# Altium PCB Copy of PCB1.PcbDoc
Units mm, origin at the board's own origin, x right, y up, seen from the top; angles counter-clockwise.
Board outline 64.77 x 39.12 mm, 2 copper layers (Top Layer, Bottom Layer); 27 components, 46 nets, 154 pads, 61 vias.
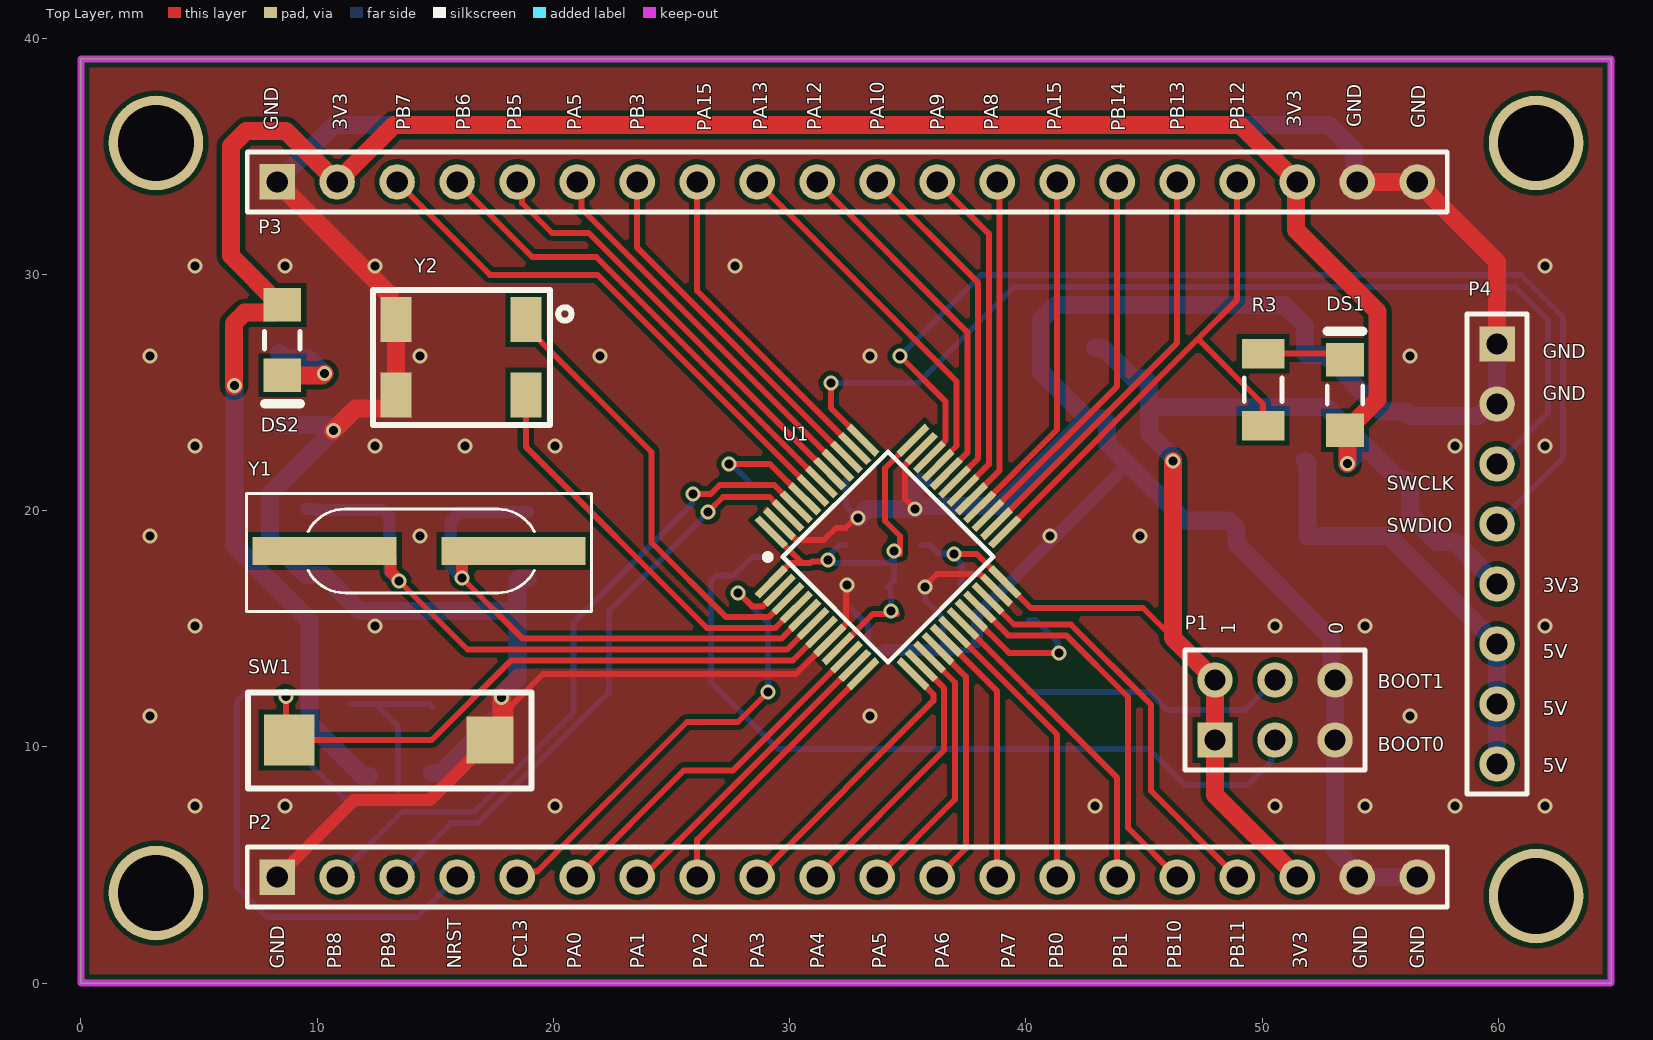
[diagram p0: Top Layer view]
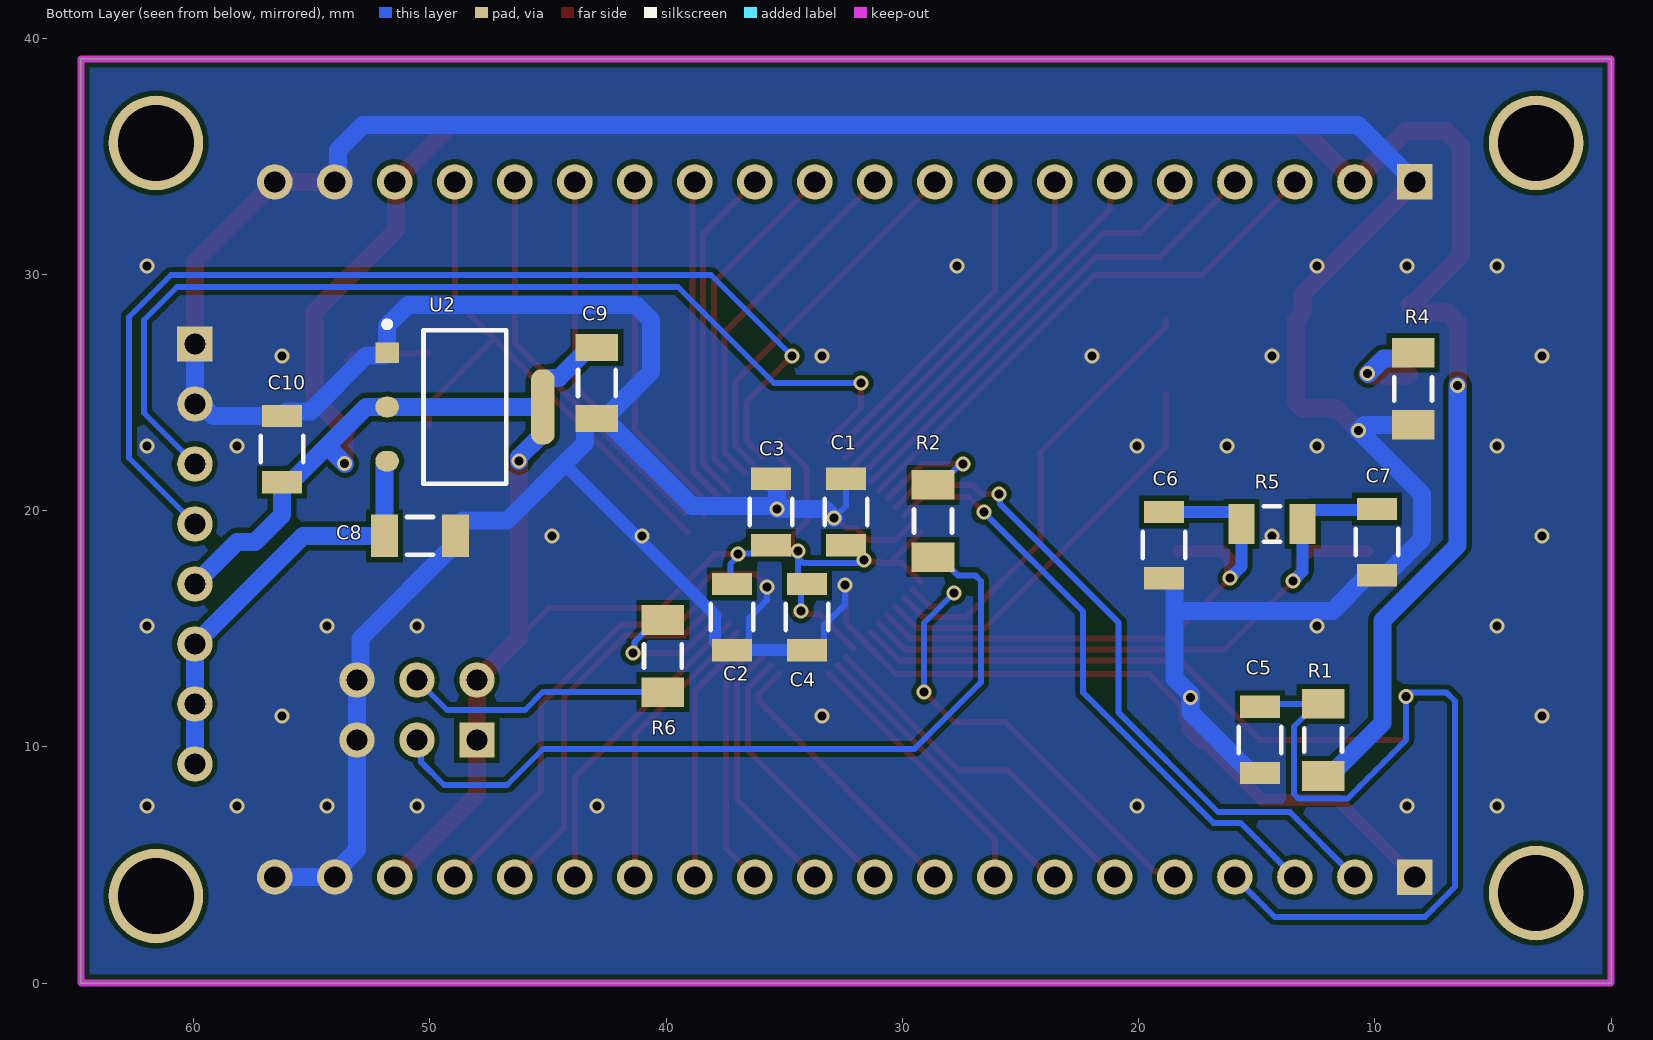
[diagram p1: Bottom Layer view, seen from below]

## Layer stack, top to bottom
Top Solder: solder mask 0.0102, Solder Resist, Dk 3.5
Top Layer: signal copper 0.0356
Dielectric 1: dielectric 0.32, FR-4, Dk 4.8
Bottom Layer: signal copper 0.0356
Bottom Solder: solder mask 0.0102, Solder Resist, Dk 3.5

## Board outline
0,0 64.77,0 64.77,39.116 0,39.116

## Design rules (kind name [scope] priority, off if disabled: settings)
Clearance [All] p1: gap=0.203 ignorepadtopadclearanceinfootprint=TRUE except(0.305: Arc-THPad Arc-Via Arc-Hole Track-THPad Track-Via Track-Hole SMDPad-THPad SMDPad-Via SMDPad-Hole THPad-THPad THPad-Via THPad-Hole Via-Via Via-Hole Fill-Hole Poly-Hole Region-Hole)
DiffPairsRouting DiffPair_DiffPairsRouting [InDifferentialPairClass('diff_90')] p1: maxlimit=0.254 minlimit=0.254 mostfreqgap=0.254 toplayer_minwidth=0.229 toplayer_maxwidth=0.229 toplayer_prefwidth=0.229 bottomlayer_minwidth=0.229 bottomlayer_maxwidth=0.229 bottomlayer_prefwidth=0.229 maxuncoupledlength=12.7
DiffPairsRouting DiffPair_90DiffPairsRouting [InDifferentialPairClass('diff_90')] p2: maxlimit=0.305 minlimit=0.305 mostfreqgap=0.305 toplayer_minwidth=0.254 toplayer_maxwidth=0.254 toplayer_prefwidth=0.254 bottomlayer_minwidth=0.254 bottomlayer_maxwidth=0.254 bottomlayer_prefwidth=0.254 maxuncoupledlength=12.7
DiffPairsRouting [All] p3: maxlimit=0.254 minlimit=0.254 mostfreqgap=0.254 toplayer_minwidth=0.381 toplayer_maxwidth=0.381 toplayer_prefwidth=0.381 bottomlayer_minwidth=0.381 bottomlayer_maxwidth=0.381 bottomlayer_prefwidth=0.381 maxuncoupledlength=12.7
MatchedLengths DiffPair_MatchedLengths [InDifferentialPairClass('diff_90')] p1: tolerance=25.4 checknetsindiffpair=FALSE checkdiffpairvsdiffpair=TRUE checkxsignals=TRUE checkothers=TRUE
MatchedLengths DiffPair_90MatchedLengths [InDifferentialPairClass('diff_90')] p2: tolerance=25.4 checknetsindiffpair=FALSE checkdiffpairvsdiffpair=TRUE checkxsignals=TRUE checkothers=TRUE
PolygonConnect [All] p1: connectstyle=Direct reliefconductorwidth=0.254 reliefentries=4 polygonreliefangle="90 Angle" airgapwidth=0.254
RoutingVias [All] p1: holewidth=0.711 width=1.27 viastyle="Through Hole" minholewidth=0.711 minwidth=1.27 maxholewidth=0.711 maxwidth=1.27
SolderMaskExpansion [All] p1: expansion=0.102 istentingtop=FALSE
Width [All] p1: maxlimit=0.762 minlimit=0.254 preferedwidth=0.305
29 further rules are at their usual default settings.

## Classes and differential pairs
component class Sheet2: 23mil C8 C9 C10 P2 P3 P4 U2
component class Sheet1: 23mil C1 C2 C3 C4 C5 C6 C7 DS1 DS2 P1 R1 R2 R3 R4 R5 R6 SW1 U1 Y1 Y2

## Components (designator, comment, footprint, x,y, rotation, side; value= is the part's Value field where it differs from the comment)
C1 "C1206 0.1uF" FP-C1206C-EB-MFG 32.385,19.939 r90 bottom value="0.22 μF"
C2 "C1206 0.1uF" FP-C1206C-EB-MFG 37.211,15.491 r270 bottom value="0.22 μF"
C3 "C1206 0.1uF" FP-C1206C-EB-MFG 35.56,19.939 r90 bottom value="0.22 μF"
C4 "C1206 0.1uF" FP-C1206C-EB-MFG 34.036,15.491 r270 bottom value="0.22 μF"
C5 "C1206 0.1uF" FP-C1206C-EB-MFG 14.859,10.29 r270 bottom value="0.22 μF"
C6 "C1206 22pf" FP-C1206C-EB-MFG 18.923,18.539 r270 bottom value="20 pF"
C7 "C1206 22pf" FP-C1206C-EB-MFG 9.906,18.666 r270 bottom value="20 pF"
C8 "CAP 10uF 1206" CAPC1206(3216)190_N 50.419,18.923 r0 bottom value=10uF
C9 "CAP 10uF 1206" CAPC1206(3216)190_N 42.926,25.4 r90 bottom value=10uF
C10 "C1206 0.1uF" FP-C1206C-EB-MFG 56.261,22.603 r90 bottom value="0.22 μF"
DS1 "597-3311-407F" DIAL-597-3311-407F_V 53.506,24.892 r90 top
DS2 "597-3311-407F" DIAL-597-3311-407F_V 8.524,27.212 r270 top
P1 "Header 3X2" HDR2X3 48.006,10.287 r0 top
P2 "Header 20" HDR1X20 8.306,4.484 r0 top
P3 "Header 20" HDR1X20 8.306,33.909 r0 top
P4 "Header 8" HDR1X8 59.944,27.051 r270 top
R1 "RC1206 10K" RESC3116X65X40ML10T20 12.192,10.288 r90 bottom
R2 "RC1206 10K" RESC3116X65X40ML10T20 28.702,19.557 r270 bottom
R3 "RC1206 1K" RESC3116X65X40ML10T20 50.038,25.117 r90 top
R4 "RC1206 1K" RESC3116X65X40ML10T20 8.382,25.147 r90 bottom
R5 "1M 1206" RESC3216X70X50LL20T25 14.351,19.431 r180 bottom
R6 "RC1206 10K" RESC3116X65X40ML10T20 40.132,13.842 r270 bottom
SW1 "TACT SWITCH" SW_342_SMD 17.313,10.287 r0 top
U1 "STM32F103C8T6" LQFP-48_19.6_393_58X11_SMD 34.163,18.034 r45 top locked
U2 "AMS1117-3.3" FP-AMS1117-IPC_C 48.514,24.384 r180 bottom
Y1 "8MHz" XTAL_314_240X47_SMD 18.319,18.288 r180 top
Y2 "32.768KHz" "XTAL_MC-405 32.7680K-G3" 18.835,24.892 r180 top

## Footprints (in the part's own frame and the unit in brackets; to place one, negate y for a bottom-side part, rotate by r counter-clockwise, add the part's x,y. Pads: shape width x height; smd on the part's side, far side on the other; paste and mask are expansions set on the pad)
CAPC1206(3216)190_N [mm] "Chip Capacitor, Body 3.2x1.6mm, Height 1.9mm, IPC Medium Density"
  rect 1.15x1.8 smd: 1(-1.5,0) 2(1.5,0)
  silkscreen extent -0.55,-0.8 0.55,0.8, body extent -1.7,-0.9 1.7,0.9, height 1.9
DIAL-597-3311-407F_V [mm] "SMD, 2-Leads, Body 1.5x3mm"
  rect 1.42x1.6 smd: 1(-1.49,0) 2(1.49,0)
  silkscreen extent -0.38,-0.75 2.7,0.75, body extent -1.5,-0.75 1.5,0.75, height 1.5
FP-AMS1117-IPC_C [mm]
  rect 1.004x0.872 smd paste+0 mask+0: 1(-3.295,2.29)
  rrect100% 1.004x0.872 smd paste+0 mask+0: 2(-3.295,0) 3(-3.295,-2.29)
  rrect87% 1.004x3.182 smd paste+0 mask+0: 4(3.295,0)
  silkscreen extent -3.42,-3.25 1.75,3.62, body extent -3.53,-3.25 3.53,3.25, height 1.8
FP-C1206C-EB-MFG [mm]
  rect 0.95x1.7 smd paste+0 mask+0: 1(-1.4,0) 2(1.4,0)
  silkscreen extent -0.55,-0.9 0.55,0.9, body extent -1.6,-0.8 1.6,0.8, height 0.88
HDR1X8 [mm] "Connector; Header; 8 Position"
  rect 1.5x1.5 hole 0.9: 1(0,0)
  round 1.5 hole 0.9: 2(2.54,0) 3(5.08,0) 4(7.62,0) 5(10.16,0) 6(12.7,0) 7(15.24,0) 8(17.78,0)
  silkscreen extent -1.27,-1.27 19.05,1.27
HDR1X20 [mm] "Connector; Header; 20 Position"
  rect 1.5x1.5 hole 0.9: 1(0,0)
  round 1.5 hole 0.9: 2(2.54,0) 3(5.08,0) 4(7.62,0) 5(10.16,0) 6(12.7,0) 7(15.24,0) 8(17.78,0) 9(20.32,0) 10(22.86,0) 11(25.4,0) 12(27.94,0) 13(30.48,0) 14(33.02,0) 15(35.56,0) 16(38.1,0) 17(40.64,0) 18(43.18,0) 19(45.72,0) 20(48.26,0)
  silkscreen extent -1.27,-1.27 49.53,1.27
HDR2X3 [mm] "Connector; Header; 3x2 Position"
  rect 1.5x1.5 hole 0.9: 1(0,0)
  round 1.5 hole 0.9: 2(0,2.54) 3(2.54,0) 4(2.54,2.54) 5(5.08,0) 6(5.08,2.54)
  silkscreen extent -1.27,-1.27 6.35,3.81
LQFP-48_19.6_393_58X11_SMD [mm] "48LQFP"
  rect 1.7x0.3 smd mask+0.076: 1(-4.238,2.75) 2(-4.238,2.25) 3(-4.238,1.75) 4(-4.238,1.25) 5(-4.238,0.75) 6(-4.238,0.25) 7(-4.238,-0.25) 8(-4.238,-0.75) 9(-4.238,-1.25) 10(-4.238,-1.75) 11(-4.238,-2.25) 12(-4.238,-2.75) 25(4.238,-2.75) 26(4.238,-2.25) 27(4.238,-1.75) 28(4.238,-1.25) 29(4.238,-0.75) 30(4.238,-0.25) 31(4.238,0.25) 32(4.238,0.75) 33(4.238,1.25) 34(4.238,1.75) 35(4.238,2.25) 36(4.238,2.75)
  rect 0.3x1.7 smd mask+0.076: 13(-2.75,-4.238) 14(-2.25,-4.238) 15(-1.75,-4.238) 16(-1.25,-4.238) 17(-0.75,-4.238) 18(-0.25,-4.238) 19(0.25,-4.238) 20(0.75,-4.238) 21(1.25,-4.238) 22(1.75,-4.238) 23(2.25,-4.238) 24(2.75,-4.238) 37(2.75,4.238) 38(2.25,4.238) 39(1.75,4.238) 40(1.25,4.238) 41(0.75,4.238) 42(0.25,4.238) 43(-0.25,4.238) 44(-0.75,4.238) 45(-1.25,4.238) 46(-1.75,4.238) 47(-2.25,4.238) 48(-2.75,4.238)
  silkscreen extent -3.72,-3.15 3.15,3.72, body extent -4.5,-4.5 4.5,4.5, height 1.7
RESC3116X65X40ML10T20 [mm] "Chip Resistor, 2-Leads, Body 3.10x1.60mm, IPC Low Density"
  rect 1.25x1.8 smd: 1(-1.525,0) 2(1.525,0)
  silkscreen extent -0.5,-0.8 0.5,0.8, body extent -1.6,-0.85 1.6,0.85, height 0.65
RESC3216X70X50LL20T25 [mm] "Chip Resistor, 2-Leads, Body 3.20x1.60mm, IPC High Density"
  rect 1.1x1.7 smd: 1(-1.3,0) 2(1.3,0)
  silkscreen extent -0.35,-0.75 0.35,0.75, body extent -1.7,-0.9 1.7,0.9, height 0.7
SW_342_SMD [mm] "CASE: SMD"
  rect 2x2 smd: 1(0,0)
  rect 2.15x2.15 smd: 2(-8.5,0)
  silkscreen extent -10.25,-2.06 1.75,2, body extent -7.17,-1.79 -1.17,1.71, height 2.4
XTAL_314_240X47_SMD [mm] "CASE: TH"
  rect 6.096x1.2 smd: 1(0,0) 2(8,0)
  silkscreen extent -3.29,-2.44 11.32,2.57, body extent -2.99,-2.27 10.9,2.41, height 3.05
"XTAL_MC-405 32.7680K-G3" [mm] "Crystal"
  rect 1.3x1.9 smd: 1(0,-3.2) 2(5.5,-3.2) 3(5.5,0) 4(0,0)
  silkscreen extent -1.93,-4.44 6.48,1.27, body extent -1.02,-4.44 6.48,1.27, height 3.6

## Part data
C1 C2 C3 C4 C5 C10: library part CMP-03020-014280-1, "CAP CER 0.22UF 50V X7R 1206", Capacitance="0.22 μF", Manufacturer=KEMET, Manufacturer Part Number=C1206C224K5RACTU, Package=C1206C-EB, Temperature="-55°C to +150°C", Temperature Characteristic=X7R, Temperature Coefficient=15%, Temperature Range High=+150°C, Temperature Range Low=-55°C, Tolerance=0.1, Voltage Rating="50 V", Automotive=Yes, Automotive Grade="Grade 0", Category=Cap, ComponentLink2Description=Datasheet, ComponentLink2URL=https://content.kemet.com/datasheets/KEM_C1007_X8R_ULTRA_150C_SMD.pdf, Device Class L1="Passive Components", Device Class L2=Capacitors, Device Class L3="Ceramic Capacitors", Digikey Description="CAP CER 0.22UF 50V X7R 1206", Height=0.88mm, Ipc Land Pattern Name=CAPC320160X78, Lead Free=Yes, Material=Ceramic, Octopart=https://octopart.com/c1206c224k5ractu-kemet-99129, RoHS=TRUE
C6 C7: library part CMP-1037-00940-2, "1206 C 20pF Ceramic Multilayer Capacitor; 50 VDC; +125degC; C0G Dielec; +/-5%", Capacitance="20 pF", Manufacturer=KEMET, Manufacturer Part Number=C1206C200J5GACTU, Package=C1206C-EB, Temperature="-55°C to +150°C", Temperature Characteristic=C0G, Temperature Coefficient=15%, Temperature Range High=+150°C, Temperature Range Low=-55°C, Tolerance=0.05, Voltage Rating="50 V", Automotive=Yes, Automotive Grade="Grade 0", Category=Cap, ComponentLink2Description=Datasheet, ComponentLink2URL=https://content.kemet.com/datasheets/KEM_C1007_X8R_ULTRA_150C_SMD.pdf, Device Class L1="Passive Components", Device Class L2=Capacitors, Device Class L3="Ceramic Capacitors", Digikey Description="1206 C 20pF Ceramic Multilayer Capacitor; 50 VDC; +125degC; C0G Dielec; +/-5%", Height=0.88mm, Ipc Land Pattern Name=CAPC320160X78, Lead Free=Yes, Material=Ceramic, Mouser Description="1206 C 20pF Ceramic Multilayer Capacitor; 50 VDC; +125degC; C0G Dielec; +/-5%", Octopart=https://octopart.com/c1206c200j5gactu-kemet-139653, RoHS=TRUE
C8 C9: library part CMP-1037-04961-1, "CAP 10uF 6.3V ±10% 1206 (3216 Metric) Thickness 1.9mm SMD", Case-EIA=1206, Case-Metric=3216, Rated Voltage="6.3 V", Tolerance=Â±10%, Max Thickness="1.9 mm", Technology=SMT
DS1 DS2: library part CMP-2000-05651-1, "LED Green, 75 mW, 30 mA, -30 to 85 degC, 2-Pin SMD, RoHS, Tape and Reel", Emitting Color=YellowGreen, Forward Current=30mA, Forward Voltage=2.5V, Manufacturer=Dialight, Operating Temp Range=-30Cto85C, Operating Temperature Classification=Commercial, Package Description="2-Pin Surface Mount Device, Body 1.5 x 3 mm", Package Type=SMD, Power Dissipation=75W, Reverse Voltage=4V, Test Current (It)=20mA, Chip Material=GaP, Datasheet URL=https://datasheet.ciiva.com/15117/getdatasheetpartid-142484-15117764.pdf, Datasheet Version=07/2002, DELETED=Compliant, High Brightness=No, Lens Dimensions=2x1.5x0.9mm, Lens Type=NonDiffused, Lum Intensity=7.5mcd, Luminous Intensity=7.5mcd, Main Category=ChipLED, Manufacturer URL=http://www.dialight.com/, Mounting=SurfaceMount, Mounting Technology=SurfaceMount, Number of  Elements=1, Package Reference=597-3311-407F, Packaging=TapeandReel, Peak Wavelength=560nm, Pin Count=2, Product Depth (mm)=1.5mm, Product Height (mm)=1.5mm, Product Length (mm)=3mm, Rad Hardened=No, Shape Type=Rectangular, Type=Uni-Color, Viewing Angle=70deg
P1: "Header, 3-Pin, Dual row", LatestRevisionDate=17-Jul-2002, LatestRevisionNote="Re-released for DXP Platform.", Publisher="Altium Limited"
P2 P3: "Header, 20-Pin", LatestRevisionDate=17-Jul-2002, LatestRevisionNote="Re-released for DXP Platform.", Publisher="Altium Limited"
P4: "Header, 8-Pin", LatestRevisionDate=17-Jul-2002, LatestRevisionNote="Re-released for DXP Platform.", Publisher="Altium Limited"
R1 R2 R6: library part CMP-1014-00623-2, "Chip Resistor, 10 KOhm, +/- 1%, 0.25 W, -55 to 155 degC, 1206 (3216 Metric), RoHS, Tape and Reel", Case Code (Imperial)=1206, Case Code (Metric)=3216, Manufacturer=Yageo, Max Operating Temperature=155degC, Min Operating Temperature=-55degC, Package Description="2-Pin Surface Mount Device, Body 3.1 x 1.6 mm", Package Quantity=5000, Package Reference=1206.0, Power Rating=250mW, Resistance=10KOhm, Temperature Coefficient=100ppm/degreesC, Tolerance=1%, Voltage Rating=200V, Case/Package=1206, Composition=ThickFilm, Datasheet URL=http://www.yageo.com/NewPortal/yageodocoutput?fileName=/pdf/R-Chip/PYu-RC_Group_51_RoHS_L_5.pdf, Datasheet Version="Rev. 5, 10/2016", Depth=1.6mm, Height=0.55mm, Lead Free=LeadFree, Length=3.1mm, Manufacturer URL=http://www.yageo.com/, Military Standard=Not, Packaging=TapeandReel, REACH SVHC=Unknown, RoHSCompliant=true, Termination=SMD/SMT, Width=1.6mm
R3 R4: library part CMP-2100-03678-1, "Chip Resistor, 1 KOhm, +/- 1%, 0.25 W, -55 to 155 degC, 1206 (3216 Metric), RoHS, Tape and Reel", Case Code (Imperial)=1206, Case Code (Metric)=3216, Manufacturer=Yageo, Max Operating Temperature=155degC, Min Operating Temperature=-55degC, Package Description="2-Pin Surface Mount Device, Body 3.1 x 1.6 mm", Package Reference=1206.0, Power Rating=250mW, Resistance=1KOhm, Temperature Coefficient=100ppm/degreesC, Tolerance=1%, Voltage Rating=200V, Case/Package=1206, Composition=ThickFilm, Datasheet URL=http://www.yageo.com/NewPortal/yageodocoutput?fileName=/pdf/R-Chip/PYu-RC_Group_51_RoHS_L_5.pdf, Datasheet Version="Rev. 5, 10/2016", Depth=1.6mm, Height=0.55mm, Lead Free=LeadFree, Length=3.1mm, Manufacturer URL=http://www.yageo.com/, Military Standard=Not, Packaging=TapeandReel, REACH SVHC=Unknown, RoHSCompliant=true, Termination=SMD/SMT
R5: library part CMP-2003-04469-1, Manufacturer=Panasonic, Part Number=ERA8AEB470V
SW1: library part SW_KSR223GLFG-SMD, "Tactile Switch SPST-NO Top Actuated Surface Mount", Case/Package=SMD, Manufacturer=C&K, Manufacturing Part Number=KSR223GLFG, Supplier Part Number-1=401-1704-1-ND, Supplier-1=Digikey
U1: library part "IC-STM32F103C8T6 _1", "ARM® Cortex®-M3 STM32F1 Microcontroller IC 32-Bit 72MHz 64KB (64K x 8) FLASH", Case/Package=48-LQFP, Manufacturer=STMicroelectronics, Supplier Part Number-1=497-6063-ND, Manufacturer Part Number=STM32F103C8T6, Supplier-1=Digikey
U2: library part CMP-209535-000001-1, "LDO Voltage Regulators 1A, 3.3V", Dropout Voltage=1.1V, Manufacturer="Advanced Monolithic Systems", Max Junction Temp=+125°C, Max Power Dissipation=1.2W, Max Supply Voltage=15V, Nominal Supply Current=5mA, Output Current=1A, Output Voltage=3.3V, Package=AMS1117, Temperature="-40°C to +125°C", Temperature Range Low=-40°C, Automotive=No, Category=IC, ComponentLink2Description=Datasheet, ComponentLink2URL=http://www.advanced-monolithic.com/pdf/ds1117.pdf, Device Class L1="Integrated Circuits (ICs)", Device Class L2="Power Management ICs", Device Class L3="Voltage Regulators - Linear", Height=1.8mm, Ipc Land Pattern Name=SOT229P700X180-4, Lead Free=Yes, Manufacturer Part Number=AMS1117-3.3, Number Of Outputs=1, Octopart=https://octopart.com/ams1117-3.3-advanced+monolithic+systems-25899300, Output Type=Fixed, RoHS=TRUE, Standoff Height=0.64mm, Temperature Range High=+125°C
Y1: library part XTAL_8MHZ-LFXTAL030234, "Crystals 8MHz 22pF -20C 70C", Case/Package=SMD, Manufacturer="IQD Frequency Products", Manufacturing Part Number=LFXTAL030234Reel, Supplier Part Number-1=449-LFXTAL030234REEL, Supplier-1=Mouser
Y2: library part "XTAL_32.768KHz-MC-405 32.7680K-G3", "Crystals SMD AT XTL MHZ +/-50PPM 12.5 PF 250 T/R", Case/Package=SMD, Manufacturer=Epson, Manufacturing Part Number="MC-405 32.7680K-G3: ROHS", Supplier Part Number-1=732-MC405327680KG3RS, Supplier-1=Mouser

## Free pads (board coordinates)
  round 4 hole 3.2: 2(3.175,3.81) 2(3.175,35.56) 2(61.595,3.683) 2(61.595,35.56)

## Via types
v1: diameter 0.635, hole 0.381, Top Layer to Bottom Layer, tented both sides, 61 vias

## Nets (pads, with @x,y where several pads share a name; then routed paths per layer and width w, separated by ;. In a path a pad name is that pad's centre, name@x,y a point inside that pad or via, vN(x,y) a via of type N, cw(c..) or ccw(c..) an arc to the next point about the centre after c; other vN are vias at no path point)
+3V3: C1.1 C2.1 C3.1 C4.1 C9.2 C10.1 DS1.1 DS2.1 P1.1 P1.2 P2.18 P3.2 P3.18 P4.5 R1.1 U1.1 U1.9 U1.24 U1.36 U1.48 U2.2 U2.4 | length 174.3
  Top Layer w0.254: U1.1 30.02,17.78 30.528,17.78 ; U1.48 30.528,17.78 ; v1(31.623,17.907) 31.55,17.834 30.939,17.834 30.885,17.78 30.528,17.78 ; U1.9 33.518,15.621 v1@34.544,15.621 ; v1@34.671,18.161 34.671,18.923 34.036,19.558 34.036,21.796 U1.36 ; v1(36.957,18.161) 37.925,18.161 U1.24 40.211,15.875 44.958,15.875 46.228,14.605
  Top Layer w0.762: v1@6.477,25.273 6.477,27.927 6.923,28.373 8.195,28.373 DS2.1 8.434,28.702 6.35,30.786 6.35,35.433 6.985,36.068 8.687,36.068 P3.2 13.259,36.322 49.073,36.322 P3.18 51.435,33.858 51.435,31.877 54.89,28.422 54.89,24.696 53.596,23.402 DS1.1 53.618,23.29 v1(53.618,21.995) ; v1(46.228,22.098) 46.228,14.605 P1.2 P1.1 48.006,7.964 P2.18
  Bottom Layer w0.254: v1(31.623,17.907) v1@31.75,17.907 ; C1.1 32.101,18.539 31.753,18.191 31.753,17.78 34.187,17.78 34.417,18.01 34.568,18.161 v1@34.671,18.161 ; v1(34.29,15.748) 34.29,16.637 34.163,16.764 34.417,17.018 v1(34.417,18.288) ; C3.1 35.935,18.539 36.283,18.191 36.927,18.191 v1(36.957,18.161) 36.957,18.064 37.274,17.747 37.274,16.954 C2.1
  Bottom Layer w0.762: v1(6.501,25.297) 6.501,18.52 9.678,15.342 9.678,11.002 11.917,8.763 R1.1 ; C9.2 43.251,26.9 44.543,25.608 44.985,25.608 45.219,25.374 U2.4 ; v1(46.228,22.098) 46.228,22.256 45.219,23.265 U2.4 ; v1@53.594,21.971 54.356,22.733 ; P4.5 58.166,18.669 57.404,18.669 56.261,19.812 C10.1 56.167,21.297 55.792,21.297 54.356,22.733 ; U2.4 U2.2 52.705,24.384 54.356,22.733
+5V: C8.2 P4.6 P4.7 P4.8 U2.3 | length 18.2
  Bottom Layer w0.762: U2.3 51.845,22.094 51.896,22.043 51.896,22.007 51.919,21.984 C8.2 55.372,18.923 P4.6 P4.7 P4.8
BOOT0: P1.3 R2.2 | length 33.7
  Bottom Layer w0.254: R2.2 28.427,18.032 27.654,17.259 26.911,17.259 26.67,17.018 26.67,12.729 29.493,9.906 45.212,9.906 46.736,8.382 49.403,8.382 50.381,9.36 50.381,10.122 P1.3
BOOT1: P1.4 R6.2 | length 11.3
  Bottom Layer w0.254: R6.2 45.214,12.317 45.974,11.557 49.276,11.557 P1.4
GND: C1.2 C2.2 C3.2 C4.2 C5.2 C6.2 C7.2 C8.1 C9.1 C10.2 P1.5 P1.6 P2.1 P2.19 P2.20 P3.1 P3.19 P3.20 P4.1 P4.2 R4.1 SW1.1 U1.8 U1.23 U1.35 U1.47 U2.1 Y2.2 Y2.3 | length 240
  Top Layer w0.254: SW1.1@17.804,10.778 18.186,11.16 18.186,11.709 19.558,13.081 30.271,13.081 U1.8 31.697,14.535 32.385,15.223 32.385,16.51 ; U1.47 29.603,19.44 30.287,18.756 31.456,18.756 31.96,19.26 32.365,19.26 32.79,19.685 v1(32.893,19.685) ; v1(35.306,20.066) 34.885,20.487 34.885,21.91 35.569,22.594 U1.35 ; v1@35.778,16.855 36.235,17.312 38.039,17.312 38.723,16.628 U1.23
  Top Layer w0.508: P2.1 11.569,7.747 14.773,7.747 SW1.1
  Top Layer w0.762: P3.1 13.066,29.149 13.066,28.361 Y2.2 Y2.3 13.335,24.592 13.066,24.323 11.623,24.323 v1@10.668,23.368 ; SW1.1 17.804,10.778 v1(17.804,12.089) ; P3.19 P3.20 59.944,30.531 P4.1
  Bottom Layer w0.254: C1.2 32.385,20.193 v1(32.893,19.685) ; v1(32.421,16.855) 32.421,16.041 33.313,15.149 33.313,14.439 33.661,14.091 C4.2 ; C3.2@35.56,21.212 C3.2@35.935,21.212 ; v1(35.739,16.764) 35.739,16.195 36.488,15.445 36.488,14.439 36.836,14.091 C2.2 37.586,14.091 C2.2@37.934,14.439
  Bottom Layer w0.508: C4.2 C2.2@36.836,14.091 ; C2.2@37.934,14.439 37.934,15.582 44.323,21.971
  Bottom Layer w0.762: P3.1 10.719,36.322 52.832,36.322 53.086,36.068 53.885,35.269 53.885,34.05 P3.19 ; R4.1 10.461,23.622 v1(10.692,23.392) 8.001,20.701 8.001,18.796 9.531,17.266 C7.2 10.281,17.266 11.799,15.748 18.477,15.748 ; C5.2 15.234,8.89 17.804,11.46 v1(17.804,12.089) ; v1@17.78,12.065 17.78,12.192 18.477,12.889 18.477,15.748 ; C6.2 18.571,17.139 18.477,17.045 18.477,15.748 ; v1(32.893,19.685) 33.274,20.066 v1(35.306,20.066) ; C3.2@35.56,21.212 35.306,20.958 v1(35.306,20.066) ; P2.20 P2.19 54.026,4.684 53.086,5.624 P1.5 P1.6 52.945,12.968 52.945,14.572 48.919,18.598 C8.1 48.919,19.248 48.598,19.569 46.725,19.569 44.323,21.971 43.444,22.85 43.444,23.706 43.25,23.9 C9.1 C9.1@42.601,23.9 ; P4.1 P4.2 59.676,24.511 59.168,24.003 C10.2 56.076,24.188 55.06,24.188 52.691,26.557 51.926,26.557 U2.1 51.809,27.82 50.927,28.702 41.275,28.702 40.64,28.067 40.64,25.861 C9.1@42.601,23.9 ; v1(35.306,20.066) 35.433,20.193 38.894,20.193 C9.1@42.601,23.9
  other v1: 4.826,7.493 8.636,7.493 20.066,7.493 42.926,7.493 50.546,7.493 54.356,7.493 58.166,7.493 61.976,7.493 2.921,11.303 33.401,11.303 56.261,11.303 4.826,15.113 12.446,15.113 50.546,15.113 54.356,15.113 61.976,15.113 2.921,18.923 14.351,18.923 41.021,18.923 44.831,18.923 4.826,22.733 12.446,22.733 16.256,22.733 20.066,22.733 58.166,22.733 61.976,22.733 2.921,26.543 14.351,26.543 21.971,26.543 33.401,26.543 56.261,26.543 4.826,30.353 8.636,30.353 12.446,30.353 27.686,30.353 61.976,30.353
NetDS1_2: DS1.2 R3.2 | length 3.6
  Top Layer w0.254: R3.2 53.246,26.642 DS1.2
NetDS2_2: DS2.2 R4.2 | length 4.1
  Top Layer w0.762: DS2.2 10.228,25.722 v1(10.311,25.805)
  Bottom Layer w0.762: R4.2 8.626,26.428 9.64,26.428 9.906,26.162 v1@10.287,25.781
NetR2_1: R2.1 U1.44 | length 5.5
  Top Layer w0.254: v1(27.432,21.971) 29.165,21.971 U1.44
  Bottom Layer w0.254: v1(27.432,21.971) 27.505,21.898 27.611,21.898 28.427,21.082 R2.1
NetR6_1: R6.1 U1.20 | length 6.5
  Top Layer w0.254: U1.20 39.288,13.97 v1(41.402,13.97)
  Bottom Layer w0.254: R6.1 40.407,15.367 41.329,14.445 41.329,14.043 v1(41.402,13.97)
NRST: C5.1 P2.4 R1.2 SW1.2 U1.7 | length 63.7
  Top Layer w0.254: v1(8.675,12.131) 8.675,10.425 SW1.2 14.846,10.287 18.218,13.659 30.141,13.659 U1.7
  Bottom Layer w0.254: v1(8.675,12.131) v1@8.675,12.293 ; C5.1 14.736,11.813 11.42,11.813 11.419,11.812 12.468,11.812 13.422,10.858 13.422,8.001 13.229,7.808 11.155,7.808 8.675,10.288 v1@8.675,12.293 ; P2.4 14.236,2.794 7.886,2.794 6.604,4.076 6.604,11.938 6.959,12.293 v1@8.675,12.293
PA0: P2.6 U1.10 | length 15.3
  Top Layer w0.254: P2.6 25.527,9.006 27.61,9.006 U1.10
PA1: P2.7 U1.11 | length 12.9
  Top Layer w0.254: P2.7 23.767,4.484 32.729,13.446 U1.11
PA2: P2.8 U1.12 | length 11.5
  Top Layer w0.254: P2.8 26.086,6.068 U1.12
PA3: P2.9 U1.13 | length 12.1
  Top Layer w0.254: P2.9 36.086,11.944 36.086,12.222 U1.13
PA4: P2.10 U1.14 | length 11.6
  Top Layer w0.254: P2.10 36.543,9.861 36.543,12.472 U1.14
PA5: P2.11 U1.15 | length 11.1
  Top Layer w0.254: P2.11 37,7.778 37,12.722 U1.15
PA6: P2.12 U1.16 | length 10.7
  Top Layer w0.254: P2.12 37.457,5.696 37.457,12.972 U1.16
PA7: P2.13 U1.17 | length 10.9
  Top Layer w0.254: U1.17 38.786,12.35 P2.13
PA8: P3.13 U1.29 | length 14
  Top Layer w0.254: U1.29 38.892,21.702 38.892,33.803 P3.13
PA9: P3.12 U1.30 | length 14.4
  Top Layer w0.254: P3.12 38.435,31.72 38.435,21.952 U1.30
PA10: P3.11 U1.31 | length 14.2
  Top Layer w0.254: P3.11 37.978,29.637 37.978,22.202 37.494,21.719 37.466,21.719 U1.31@37.465,21.717
PA12: P3.10 U1.32 | length 15.3
  Top Layer w0.254: P3.10 37.52,27.555 37.52,22.452 U1.32
PA13: P3.9 U1.33 | length 15.8
  Top Layer w0.254: P3.9 37.063,25.472 37.063,22.73 36.276,21.943 U1.33
PA15: P3.8 U1.38 | length 13.5
  Top Layer w0.254: P3.8 26.086,29.293 U1.38@32.374,23.004
PB0: P2.14 U1.18 | length 12.2
  Top Layer w0.254: U1.18 41.326,10.517 P2.14
PB1: P2.15 U1.19 | length 13.4
  Top Layer w0.254: U1.19 43.866,8.685 P2.15
PB3: P3.7 U1.39 | length 15.3
  Top Layer w0.254: P3.7 23.546,31.126 U1.39
PB4: P3.6 U1.40 | length 17.2
  Top Layer w0.254: P3.6 21.187,33.728 21.187,32.778 U1.40@32.493,21.472
PB5: P3.5 U1.41 | length 18.4
  Top Layer w0.254: P3.5 18.669,33.706 18.669,33.02 19.939,31.75 21.494,31.75 U1.41@31.427,21.817
PB6: P3.4 U1.42 | length 20.7
  Top Layer w0.254: P3.4 19.101,30.734 21.817,30.734 U1.42
PB7: P3.3 U1.43 | length 23
  Top Layer w0.254: P3.3 17.323,29.972 21.871,29.972 U1.43
PB8: P2.2 U1.45 | length 29.2
  Top Layer w0.254: v1(25.908,20.701) 26.658,20.701 27.039,21.082 29.347,21.082 U1.45
  Bottom Layer w0.254: P2.2 13.601,7.239 16.637,7.239 20.84,11.442 20.84,15.252 25.859,20.271 25.859,20.652 v1(25.908,20.701)
PB9: P2.3 U1.46 | length 25.5
  Top Layer w0.254: v1(26.551,19.934) 26.551,19.947 27.178,20.574 29.148,20.574 U1.46
  Bottom Layer w0.254: P2.3 15.683,6.782 16.826,6.782 22.352,12.307 22.352,15.736 v1(26.551,19.934)
PB10: P2.16 U1.21 | length 16.3
  Top Layer w0.254: U1.21 39.245,14.719 41.712,14.719 44.323,12.108 44.323,6.567 P2.16
PB11: P2.17 U1.22 | length 17.6
  Top Layer w0.254: U1.22 39.495,15.176 41.902,15.176 45.305,11.774 45.305,8.126 P2.17
PB12: P3.17 R3.1 U1.25 | length 23.7
  Top Layer w0.254: U1.25 47.284,27.265 ; P3.17 48.946,28.928 47.284,27.265 ; R3.1 50.038,24.511 47.284,27.265
PB13: P3.16 U1.26 | length 17
  Top Layer w0.254: U1.26@39.197,19.886 46.406,27.095 P3.16
PB14: P3.15 U1.27 | length 16.4
  Top Layer w0.254: U1.27 43.866,25.262 P3.15
PB15: P3.14 U1.28 | length 15.1
  Top Layer w0.254: U1.28 41.326,23.429 P3.14
PC13: P2.5 U1.2 | length 20.9
  Top Layer w0.254: P2.5 18.7,4.718 19.323,4.718 25.654,11.049 27.813,11.049 v1(29.083,12.319) ; v1(27.813,16.51) 27.85,16.51 28.415,15.945 28.864,15.945 29.547,16.628 U1.2
  Bottom Layer w0.254: v1(27.813,16.51) 29.083,15.24 v1(29.083,12.319)
SWCLK: P4.3 U1.37 | length 42.6
  Top Layer w0.254: v1(31.75,25.4) 31.75,24.336 U1.37
  Bottom Layer w0.254: v1(31.75,25.4) 35.433,25.4 39.497,29.464 60.706,29.464 62.103,28.067 62.103,24.13 P4.3
SWDIO: P4.4 U1.34 | length 45.5
  Top Layer w0.254: v1(34.671,26.543) 36.606,24.608 36.606,22.98 35.922,22.296 U1.34
  Bottom Layer w0.254: v1(34.671,26.543) 38.1,29.972 60.96,29.972 62.738,28.194 62.738,22.225 P4.4
XTALA: C6.1 R5.1 U1.5 Y1.1 | length 25.1
  Top Layer w0.254: v1(16.129,17.145) 18.701,14.573 29.641,14.573 U1.5
  Top Layer w0.508: v1(16.129,17.145) 16.129,17.942 16.475,18.288 Y1.1
  Bottom Layer w0.508: v1(16.129,17.145) 15.651,17.623 R5.1 15.651,19.516 16.074,19.939 C6.1
XTALB: C7.1 R5.2 U1.6 Y1.2 | length 29.4
  Top Layer w0.254: v1(13.462,17.018) 16.364,14.116 29.891,14.116 U1.6
  Top Layer w0.508: Y1.2 12.767,18.288 13.113,17.942 13.113,17.402 13.462,17.052 v1(13.462,17.018)
  Bottom Layer w0.508: C7.1@9.531,20.066 C7.1 9.945,20.027 12.755,20.027 R5.2@13.051,19.731 ; R5.2 13.051,17.429 v1(13.462,17.018)
XTALC: U1.3 Y2.1 | length 19.1
  Top Layer w0.254: Y2.1 18.835,27.792 24.151,22.476 24.151,18.648 27.312,15.487 29.113,15.487 29.901,16.275 U1.3
XTALD: U1.4 Y2.4 | length 17.2
  Top Layer w0.254: Y2.4 18.835,22.694 26.499,15.03 29.391,15.03 U1.4

## Polygon pours and split planes (outlines as drawn)
GND on Bottom Layer "GND_L02_P002" (solid, remove dead copper, pour order 2): 0.127,38.989 0,38.862 0,0 64.77,0 64.77,39.116
GND on Top Layer "GND_L01_P001" (solid, remove dead copper, pour order 1): 0,39.116 0,0 0.127,0.127 64.643,0.127 64.643,38.989

## Keep-outs
Keep-Out Layer:
  lines w0.305: 0,0 0,39.116 ; 0,0 64.77,0 ; 0,0 0,39.116 ; 0,0 64.77,0 ; 0,39.116 64.77,39.116 ; 0,39.116 64.77,39.116 ; 64.77,0 64.77,39.116 ; 64.77,0 64.77,39.116

## Silkscreen, mask and mechanical layers (free items; w line width, h text height)
Top Overlay:
  text "3V3" at 51.664,36.22 h0.58 r90
  text "GND" at 54.204,36.22 h0.58 r90
  text "GND" at 56.906,36.185 h0.58 r90
  text "GND" at 8.357,36.093 h0.58 r90
  text "3V3" at 11.278,36.093 h0.58 r90
  text "PB7" at 13.945,36.093 h0.58 r90
  text "PB6" at 16.485,36.093 h0.58 r90
  text "PB5" at 18.644,36.093 h0.58 r90
  text "PA5" at 21.184,36.093 h0.58 r90
  text "PB3" at 23.851,36.093 h0.58 r90
  text "PA13" at 29.058,36.093 h0.58 r90
  text "PA12" at 31.344,36.093 h0.58 r90
  text "PA10" at 34.011,36.093 h0.58 r90
  text "PA9" at 36.551,36.093 h0.58 r90
  text "PA8" at 38.837,36.093 h0.58 r90
  text "PA15" at 41.504,36.093 h0.58 r90
  text "PB13" at 46.711,36.093 h0.58 r90
  text "PB12" at 49.251,36.093 h0.58 r90
  text "PA15" at 26.68,36.058 h0.58 r90
  text "PB14" at 44.206,36.058 h0.58 r90
  text "GND" at 61.874,26.441 h0.58
  text "GND" at 61.874,24.663 h0.58
  text "SWCLK" at 55.27,20.853 h0.58
  text "SWDIO" at 55.27,19.075 h0.58
  text "3V3" at 61.874,16.535 h0.58
  text "1" at 48.87,14.757 h0.58 r90
  text "0" at 53.442,14.757 h0.58 r90
  text "5V" at 61.874,13.741 h0.58
  text "BOOT1" at 54.889,12.471 h0.58
  text "5V" at 61.874,11.328 h0.58
  text "BOOT0" at 54.889,9.804 h0.58
  text "5V" at 61.874,8.915 h0.58
  text "GND" at 8.611,0.605 h0.58 r90
  text "PB8" at 11.024,0.605 h0.58 r90
  text "PB9" at 13.31,0.605 h0.58 r90
  text "NRST" at 16.104,0.605 h0.58 r90
  text "PC13" at 18.898,0.605 h0.58 r90
  text "PA0" at 21.184,0.605 h0.58 r90
  text "PA1" at 23.851,0.605 h0.58 r90
  text "PA2" at 26.518,0.605 h0.58 r90
  text "PA3" at 28.931,0.605 h0.58 r90
  text "PA4" at 31.471,0.605 h0.58 r90
  text "PA5" at 34.088,0.605 h0.58 r90
  text "PA6" at 36.755,0.605 h0.58 r90
  text "PA7" at 39.549,0.605 h0.58 r90
  text "PB0" at 41.581,0.605 h0.58 r90
  text "PB1" at 44.298,0.605 h0.58 r90
  text "PB10" at 46.584,0.605 h0.58 r90
  text "PB11" at 49.251,0.605 h0.58 r90
  text "3V3" at 51.918,0.605 h0.58 r90
  text "GND" at 54.458,0.605 h0.58 r90
  text "GND" at 56.871,0.605 h0.58 r90